# Altium PCB pcb.pcbdoc (part 6 of 6)
Units mm, origin at the board's own origin, x right, y up, seen from the top; angles counter-clockwise.
Board outline 95 x 60 mm, 4 copper layers (Top Layer, TopInt Layer, BotInt Layer, Bottom Layer), stack 1.459 mm thick; 162 components, 164 nets, 673 pads, 269 vias.
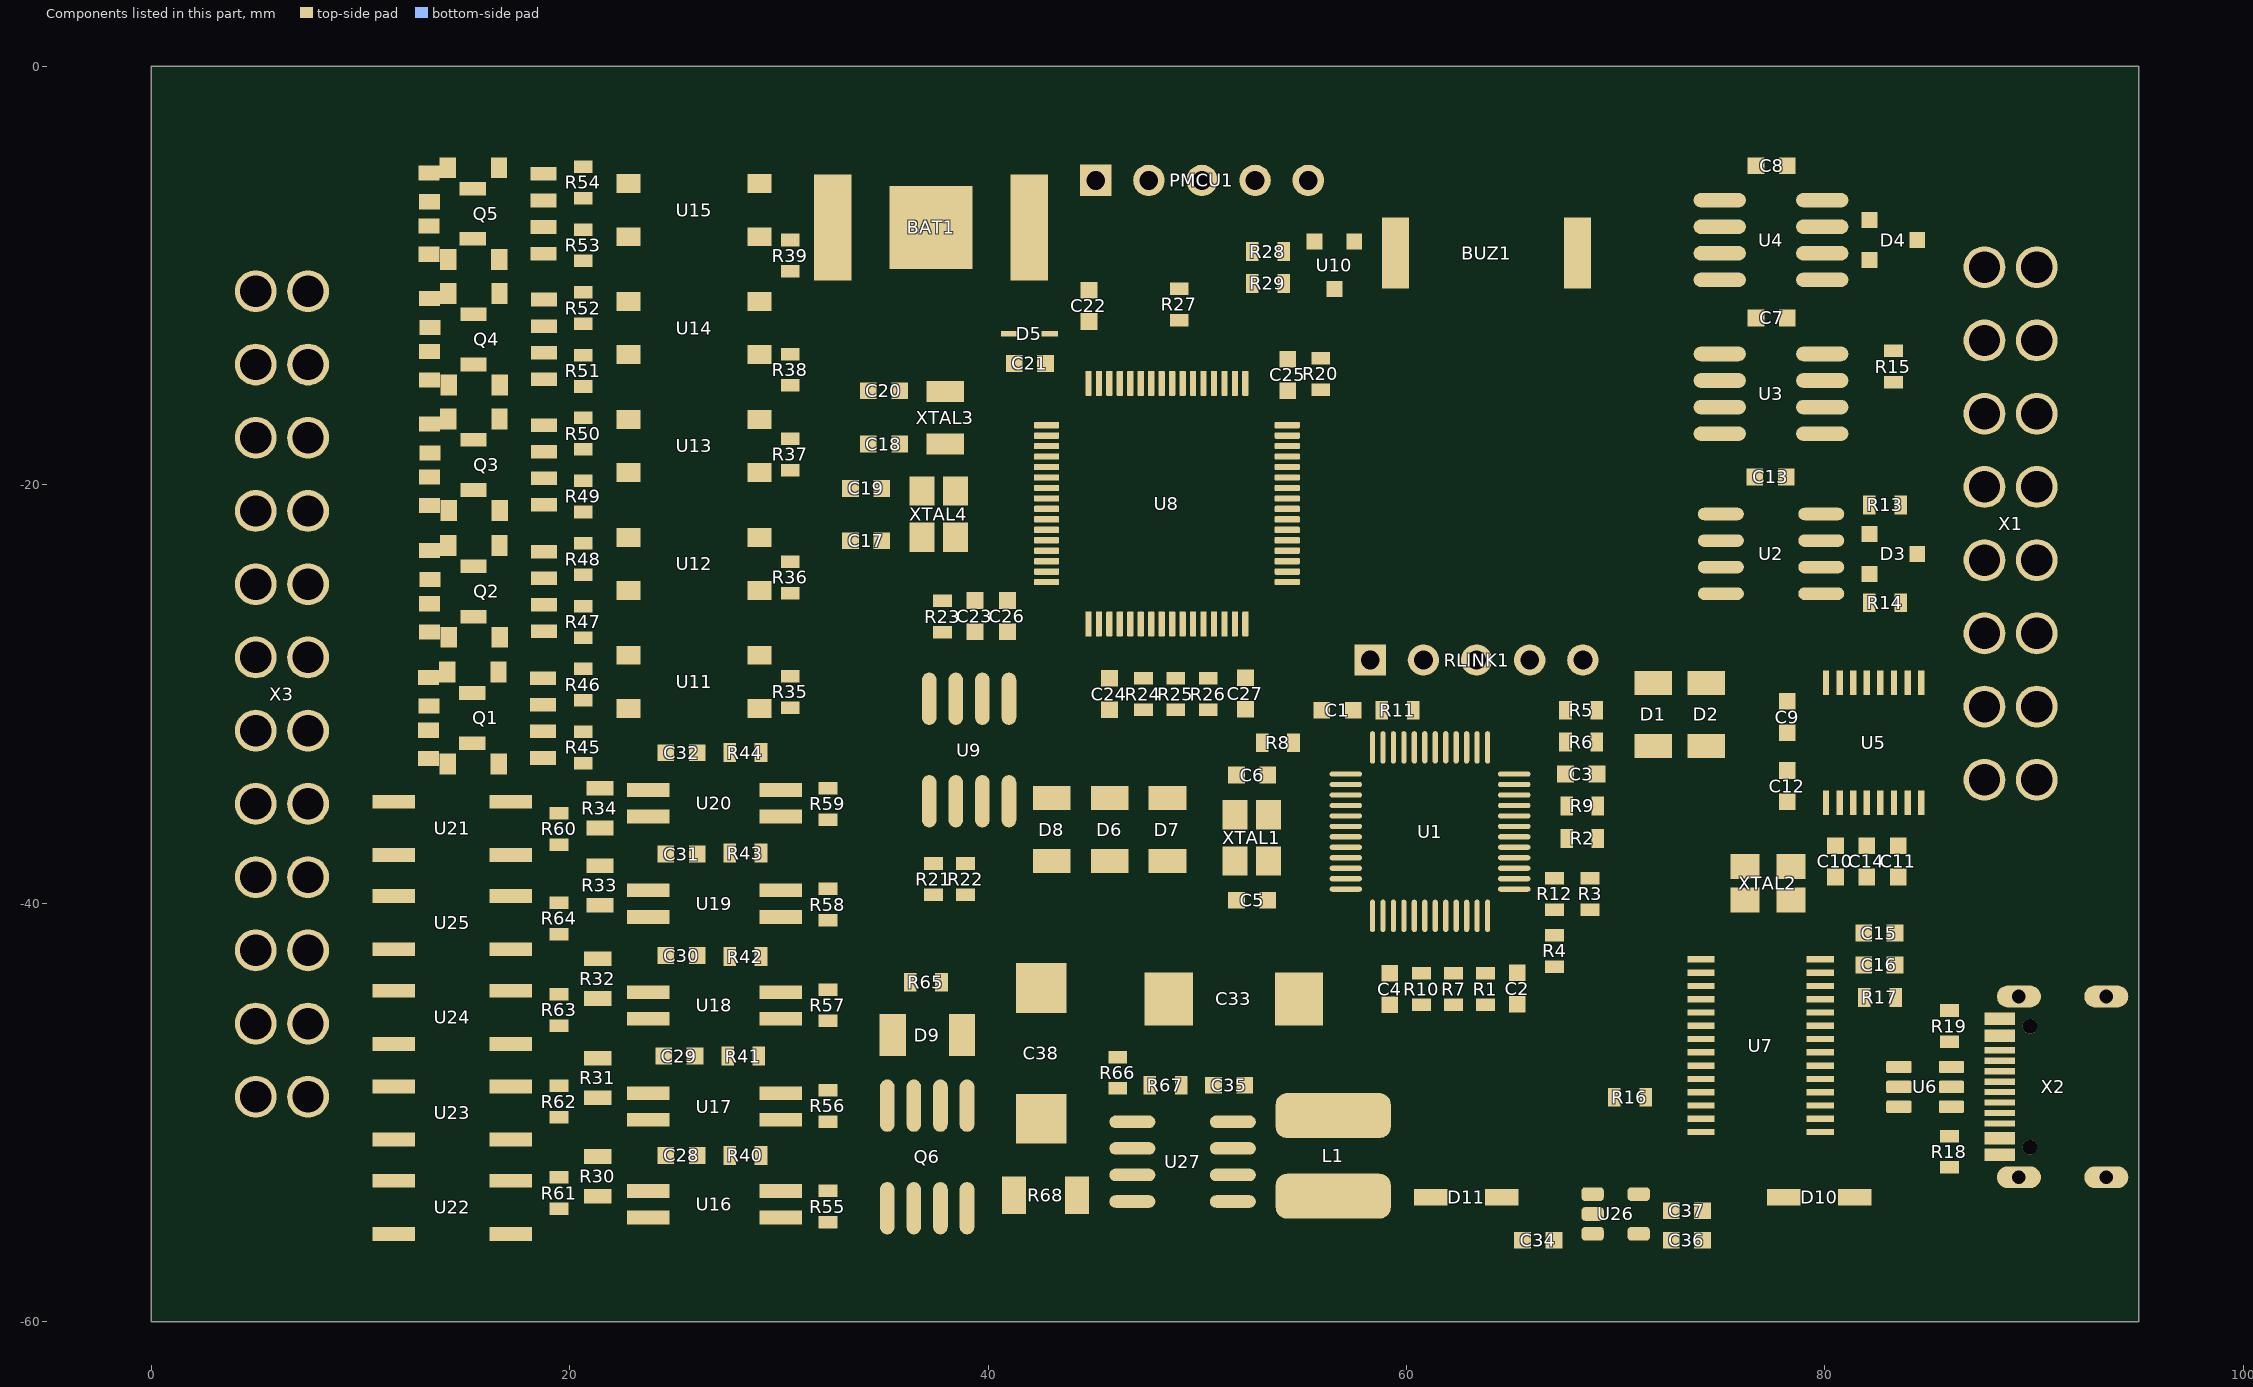
[diagram p8: the components of this part, seen from the top]

## Via types
v1: diameter 0.7, hole 0.3, Top Layer to Bottom Layer, tented both sides, 249 vias
v2: diameter 1, hole 0.5, Top Layer to Bottom Layer, tented both sides, 20 vias

## Nets (pads, with @x,y where several pads share a name; then routed paths per layer and width w, separated by ;. In a path a pad name is that pad's centre, name@x,y a point inside that pad or via, vN(x,y) a via of type N, cw(c..) or ccw(c..) an arc to the next point about the centre after c; other vN are vias at no path point) (continued)
copper on no net: (continued)
  Bottom Layer w0.025: 66.276,-8.705 66.453,-8.705 ; 66.276,-8.68 66.453,-8.68 ; 66.276,-7.486 66.453,-7.486 ; 66.276,-7.461 66.453,-7.461 ; 66.276,-7.435 66.453,-7.435 ; 66.276,-7.41 66.453,-7.41 ; 66.276,-5.251 66.428,-5.251 ; 66.276,-5.226 66.428,-5.226 ; 66.276,-5.2 66.428,-5.2 ; 66.276,-5.175 66.428,-5.175 ; 66.276,-5.149 66.428,-5.149 ; 66.276,-4.895 66.428,-4.895 ; 66.276,-4.87 66.428,-4.87 ; 66.276,-4.845 66.428,-4.845 ; 66.276,-4.819 66.428,-4.819 ; 66.276,-4.794 66.428,-4.794 ; 66.276,-4.768 66.428,-4.768 ; 66.276,-4.743 66.428,-4.743 ; 66.276,-4.718 66.428,-4.718 ; 66.276,-4.692 66.428,-4.692 ; 66.276,-4.667 66.428,-4.667 ; 66.276,-4.641 66.428,-4.641 ; 66.276,-4.616 66.428,-4.616 ; 66.276,-4.591 66.428,-4.591 ; 66.276,-4.565 66.428,-4.565 ; 66.276,-4.54 66.428,-4.54 ; 66.276,-4.514 66.428,-4.514 ; 66.276,-4.489 66.428,-4.489 ; 66.276,-4.464 66.428,-4.464 ; 66.276,-4.438 66.428,-4.438 ; 66.276,-4.413 66.428,-4.413 ; 66.276,-4.387 66.428,-4.387 ; 66.276,-4.362 66.428,-4.362 ; 66.276,-4.337 66.428,-4.337 ; 66.276,-4.083 66.428,-4.083 ; 66.276,-4.057 66.428,-4.057 ; 66.276,-4.032 66.428,-4.032 ; 66.276,-4.006 66.428,-4.006 ; 66.276,-3.981 66.428,-3.981 ; 66.276,-3.956 66.428,-3.956 ; 66.276,-3.93 66.428,-3.93 ; 66.276,-3.905 66.428,-3.905 ; 66.276,-3.879 66.428,-3.879 ; 66.276,-3.854 66.428,-3.854 ; 66.276,-3.829 66.428,-3.829 ; 66.276,-3.803 66.428,-3.803 ; 66.276,-3.778 66.428,-3.778 ; 66.276,-3.752 66.428,-3.752 ; 66.276,-3.727 66.428,-3.727 ; 66.276,-3.702 66.428,-3.702 ; 66.276,-3.676 66.428,-3.676 ; 66.276,-3.651 66.428,-3.651 ; 66.276,-3.625 66.428,-3.625 ; 66.276,-3.6 66.428,-3.6 ; 66.276,-3.575 66.428,-3.575 ; 66.276,-3.549 66.428,-3.549 ; 66.276,-3.524 66.428,-3.524 ; 66.276,-3.473 66.428,-3.473 ; 66.276,-3.448 66.428,-3.448 ; 66.301,-9.188 66.479,-9.188 ; 66.301,-9.163 66.479,-9.163 ; 66.301,-9.137 66.479,-9.137 ; 66.301,-8.655 66.479,-8.655 ; 66.301,-8.629 66.479,-8.629 ; 66.301,-8.604 66.504,-8.604 ; 66.301,-7.385 66.479,-7.385 ; 66.301,-7.359 66.733,-7.359 ; 66.301,-7.334 66.682,-7.334 ; 66.301,-7.308 66.631,-7.308 ; 66.301,-7.283 66.606,-7.283 ; 66.301,-7.258 66.555,-7.258 ; 66.301,-7.232 66.53,-7.232 ; 66.301,-7.207 66.53,-7.207 ; 66.301,-7.181 66.504,-7.181 ; 66.301,-7.156 66.479,-7.156 ; 66.301,-7.131 66.479,-7.131 ; 66.301,-7.105 66.479,-7.105 ; 66.301,-7.08 66.479,-7.08 ; 66.301,-7.054 66.479,-7.054 ; 66.301,-7.029 66.479,-7.029 ; 66.301,-7.004 66.479,-7.004 ; 66.301,-6.978 66.479,-6.978 ; 66.301,-6.953 66.479,-6.953 ; 66.301,-6.927 66.479,-6.927 ; 66.301,-6.902 66.479,-6.902 ; 66.301,-6.877 66.479,-6.877 ; 66.301,-6.851 67.165,-6.851 ; 66.301,-6.826 67.139,-6.826 ; 66.301,-6.8 67.088,-6.8 ; 66.301,-6.775 67.012,-6.775 ; 66.301,-6.75 66.885,-6.75 ; 66.301,-6.724 66.479,-6.724 ; 66.301,-6.699 66.479,-6.699 ; 66.301,-6.673 66.479,-6.673 ; 66.301,-6.648 66.479,-6.648 ; 66.301,-6.623 66.479,-6.623 ; 66.301,-6.597 66.479,-6.597 ; 66.301,-6.572 66.479,-6.572 ; 66.301,-6.546 66.479,-6.546 ; 66.301,-6.521 66.479,-6.521 ; 66.326,-9.264 66.53,-9.264 ; 66.326,-9.239 66.53,-9.239 ; 66.326,-9.213 66.504,-9.213 ; 66.326,-8.578 66.504,-8.578 ; 66.326,-8.553 66.53,-8.553 ; 66.326,-6.496 66.504,-6.496 ; 66.326,-6.47 66.504,-6.47 ; 66.326,-6.445 66.53,-6.445 ; 66.352,-9.315 66.58,-9.315 ; 66.352,-9.29 66.555,-9.29 ; 66.352,-8.528 66.555,-8.528 ; 66.352,-8.502 66.555,-8.502 ; 66.352,-6.419 66.53,-6.419 ; 66.352,-6.394 66.58,-6.394 ; 66.377,-9.34 66.606,-9.34 ; 66.377,-8.477 66.58,-8.477 ; 66.377,-8.451 66.606,-8.451 ; 66.377,-6.369 66.606,-6.369 ; 66.377,-6.343 66.657,-6.343 ; 66.403,-9.366 66.631,-9.366 ; 66.403,-8.426 66.657,-8.426 ; 66.403,-6.318 67.165,-6.318 ; 66.428,-9.391 66.682,-9.391 ; 66.428,-8.401 66.707,-8.401 ; 66.428,-6.292 67.139,-6.292 ; 66.453,-9.417 66.758,-9.417 ; 66.453,-8.375 66.784,-8.375 ; 66.453,-6.267 67.114,-6.267 ; 66.479,-9.442 67.241,-9.442 ; 66.479,-8.35 67.215,-8.35 ; 66.504,-9.467 67.19,-9.467 ; 66.504,-8.324 67.19,-8.324 ; 66.504,-7.385 67.241,-7.385 ; 66.504,-6.242 67.063,-6.242 ; 66.53,-9.493 67.165,-9.493 ; 66.53,-7.41 67.215,-7.41 ; 66.555,-8.299 67.139,-8.299 ; 66.555,-7.435 67.19,-7.435 ; 66.555,-6.216 67.012,-6.216 ; 66.58,-9.518 67.114,-9.518 ; 66.606,-8.274 67.088,-8.274 ; 66.606,-7.461 67.165,-7.461 ; 66.631,-9.544 67.063,-9.544 ; 66.657,-8.248 67.038,-8.248 ; 66.657,-7.486 67.114,-7.486 ; 66.657,-6.191 66.911,-6.191 ; 66.707,-4.794 66.885,-4.794 ; 66.707,-4.768 66.885,-4.768 ; 66.707,-4.743 66.885,-4.743 ; 66.707,-4.718 66.885,-4.718 ; 66.707,-4.692 66.86,-4.692 ; 66.707,-4.667 66.86,-4.667 ; 66.707,-4.641 66.86,-4.641 ; 66.707,-4.616 66.86,-4.616 ; 66.707,-4.591 66.86,-4.591 ; 66.707,-4.565 66.86,-4.565 ; 66.707,-4.54 66.86,-4.54 ; 66.707,-4.514 66.86,-4.514 ; 66.707,-4.489 66.885,-4.489 ; 66.707,-4.464 66.885,-4.464 ; 66.707,-4.438 66.885,-4.438 ; 66.707,-4.413 66.885,-4.413 ; 66.733,-7.512 67.063,-7.512 ; 66.733,-4.895 66.936,-4.895 ; 66.733,-4.87 66.911,-4.87 ; 66.733,-4.845 66.911,-4.845 ; 66.733,-4.819 66.885,-4.819 ; 66.733,-4.387 66.911,-4.387 ; 66.733,-4.362 66.911,-4.362 ; 66.733,-4.337 66.911,-4.337 ; 66.733,-4.311 66.936,-4.311 ; 66.758,-9.569 66.961,-9.569 ; 66.758,-4.946 66.961,-4.946 ; 66.758,-4.921 66.936,-4.921 ; 66.758,-4.286 66.936,-4.286 ; 66.758,-4.26 66.961,-4.26 ; 66.784,-6.877 67.19,-6.877 ; 66.784,-4.997 66.987,-4.997 ; 66.784,-4.972 66.961,-4.972 ; 66.784,-4.235 66.987,-4.235 ; 66.784,-4.21 66.987,-4.21 ; 66.809,-5.048 67.038,-5.048 ; 66.809,-5.022 67.012,-5.022 ; 66.809,-4.184 67.012,-4.184 ; 66.809,-4.159 67.038,-4.159 ; 66.834,-5.073 67.088,-5.073 ; 66.834,-4.133 67.088,-4.133 ; 66.86,-5.099 67.114,-5.099 ; 66.86,-4.108 67.139,-4.108 ; 66.885,-5.124 67.19,-5.124 ; 66.885,-4.083 67.215,-4.083 ; 66.911,-8.375 67.241,-8.375 ; 66.911,-6.902 67.215,-6.902 ; 66.911,-6.343 67.19,-6.343 ; 66.911,-5.149 67.673,-5.149 ; 66.911,-4.057 67.647,-4.057 ; 66.936,-9.417 67.266,-9.417 ; 66.936,-5.175 67.622,-5.175 ; 66.936,-4.032 67.622,-4.032 ; 66.987,-8.401 67.266,-8.401 ; 66.987,-7.359 67.266,-7.359 ; 66.987,-6.927 67.241,-6.927 ; 66.987,-6.369 67.215,-6.369 ; 66.987,-5.2 67.596,-5.2 ; 66.987,-4.006 67.596,-4.006 ; 67.012,-9.391 67.266,-9.391 ; 67.012,-6.394 67.241,-6.394 ; 67.012,-5.226 67.546,-5.226 ; 67.038,-8.426 67.292,-8.426 ; 67.038,-7.334 67.292,-7.334 ; 67.038,-6.953 67.266,-6.953 ; 67.038,-6.419 67.266,-6.419 ; 67.038,-3.981 67.546,-3.981 ; 67.063,-9.366 67.292,-9.366 ; 67.063,-7.308 67.292,-7.308 ; 67.063,-6.978 67.292,-6.978 ; 67.063,-6.445 67.266,-6.445 ; 67.088,-9.34 67.317,-9.34 ; 67.088,-8.451 67.317,-8.451 ; 67.088,-7.283 67.292,-7.283 ; 67.088,-7.004 67.292,-7.004 ; 67.088,-6.47 67.266,-6.47 ; 67.088,-5.251 67.495,-5.251 ; 67.088,-3.956 67.469,-3.956 ; 67.114,-9.315 67.342,-9.315 ; 67.114,-8.477 67.317,-8.477 ; 67.114,-7.258 67.317,-7.258 ; 67.114,-7.029 67.292,-7.029 ; 67.114,-6.572 67.292,-6.572 ; 67.114,-6.546 67.292,-6.546 ; 67.114,-6.521 67.292,-6.521 ; 67.114,-6.496 67.292,-6.496 ; 67.139,-9.29 67.342,-9.29 ; 67.139,-8.502 67.342,-8.502 ; 67.139,-7.232 67.317,-7.232 ; 67.139,-7.207 67.317,-7.207 ; 67.139,-7.181 67.317,-7.181 ; 67.139,-7.156 67.317,-7.156 ; 67.139,-7.131 67.317,-7.131 ; 67.139,-7.105 67.317,-7.105 ; 67.139,-7.08 67.317,-7.08 ; 67.139,-7.054 67.317,-7.054 ; 67.165,-9.264 67.368,-9.264 ; 67.165,-8.553 67.368,-8.553 ; 67.165,-8.528 67.368,-8.528 ; 67.19,-9.239 67.368,-9.239 ; 67.19,-9.213 67.393,-9.213 ; 67.19,-8.604 67.393,-8.604 ; 67.19,-8.578 67.368,-8.578 ; 67.19,-5.276 67.368,-5.276 ; 67.215,-9.188 67.393,-9.188 ; 67.215,-9.163 67.393,-9.163 ; 67.215,-8.655 67.419,-8.655 ; 67.215,-8.629 67.393,-8.629 ; 67.215,-3.93 67.342,-3.93 ; 67.241,-9.137 67.419,-9.137 ; 67.241,-9.112 67.419,-9.112 ; 67.241,-9.086 67.419,-9.086 ; 67.241,-9.061 67.419,-9.061 ; 67.241,-8.756 67.419,-8.756 ; 67.241,-8.731 67.419,-8.731 ; 67.241,-8.705 67.419,-8.705 ; 67.241,-8.68 67.419,-8.68 ; 67.266,-9.036 67.419,-9.036 ; 67.266,-9.01 67.419,-9.01 ; 67.266,-8.985 67.419,-8.985 ; 67.266,-8.959 67.444,-8.959 ; 67.266,-8.934 67.444,-8.934 ; 67.266,-8.909 67.444,-8.909 ; 67.266,-8.883 67.444,-8.883 ; 67.266,-8.858 67.444,-8.858 ; 67.266,-8.832 67.444,-8.832 ; 67.266,-8.807 67.419,-8.807 ; 67.266,-8.782 67.419,-8.782 ; 67.368,-5.124 67.698,-5.124 ; 67.368,-4.083 67.673,-4.083 ; 67.444,-5.099 67.723,-5.099 ; 67.444,-4.108 67.698,-4.108 ; 67.495,-5.073 67.723,-5.073 ; 67.495,-4.133 67.723,-4.133 ; 67.52,-5.048 67.749,-5.048 ; 67.52,-4.159 67.749,-4.159 ; 67.546,-5.022 67.774,-5.022 ; 67.546,-4.184 67.774,-4.184 ; 67.571,-4.997 67.774,-4.997 ; 67.571,-4.21 67.774,-4.21 ; 67.596,-7.486 67.749,-7.486 ; 67.596,-7.461 67.749,-7.461 ; 67.596,-7.435 67.749,-7.435 ; 67.596,-7.41 67.749,-7.41 ; 67.596,-7.385 67.749,-7.385 ; 67.596,-7.359 67.749,-7.359 ; 67.596,-7.334 67.749,-7.334 ; 67.596,-7.308 67.749,-7.308 ; 67.596,-7.283 67.749,-7.283 ; 67.596,-7.258 67.749,-7.258 ; 67.596,-7.232 67.749,-7.232 ; 67.596,-7.207 67.749,-7.207 ; 67.596,-7.181 67.749,-7.181 ; 67.596,-7.156 67.749,-7.156 ; 67.596,-7.131 67.749,-7.131 ; 67.596,-7.105 67.749,-7.105 ; 67.596,-7.08 67.749,-7.08 ; 67.596,-7.054 67.749,-7.054 ; 67.596,-7.029 67.749,-7.029 ; 67.596,-7.004 67.749,-7.004 ; 67.596,-6.978 67.749,-6.978 ; 67.596,-6.953 67.749,-6.953 ; 67.596,-6.927 67.749,-6.927 ; 67.596,-6.902 67.749,-6.902 ; 67.596,-6.877 67.749,-6.877 ; 67.596,-6.851 67.749,-6.851 ; 67.596,-6.826 67.749,-6.826 ; 67.596,-6.8 67.749,-6.8 ; 67.596,-6.775 67.749,-6.775 ; 67.596,-6.75 67.749,-6.75 ; 67.596,-6.724 67.749,-6.724 ; 67.596,-6.699 67.749,-6.699 ; 67.596,-6.673 67.749,-6.673 ; 67.596,-6.648 67.749,-6.648 ; 67.596,-6.623 67.749,-6.623 ; 67.596,-6.597 67.749,-6.597 ; 67.596,-6.572 67.774,-6.572 ; 67.596,-6.546 67.774,-6.546 ; 67.596,-6.521 67.774,-6.521 ; 67.596,-6.496 67.774,-6.496 ; 67.596,-4.972 67.8,-4.972 ; 67.596,-4.26 67.8,-4.26 ; 67.596,-4.235 67.8,-4.235 ; 67.622,-6.47 67.8,-6.47 ; 67.622,-6.445 67.8,-6.445 ; 67.622,-6.419 67.825,-6.419 ; 67.622,-6.394 67.85,-6.394 ; 67.622,-4.946 67.8,-4.946 ; 67.622,-4.921 67.825,-4.921 ; 67.622,-4.286 67.825,-4.286 ; 67.647,-9.29 67.825,-9.29 ; 67.647,-9.264 67.825,-9.264 ; 67.647,-9.239 67.825,-9.239 ; 67.647,-9.213 67.825,-9.213 ; 67.647,-9.188 67.825,-9.188 ; 67.647,-9.163 67.825,-9.163 ; 67.647,-9.137 67.825,-9.137 ; 67.647,-9.112 67.85,-9.112 ; 67.647,-8.629 67.825,-8.629 ; 67.647,-8.604 67.825,-8.604 ; 67.647,-8.578 67.825,-8.578 ; 67.647,-8.553 67.825,-8.553 ; 67.647,-6.369 67.876,-6.369 ; 67.647,-6.343 67.952,-6.343 ; 67.647,-4.895 67.825,-4.895 ; 67.647,-4.87 67.825,-4.87 ; 67.647,-4.337 67.825,-4.337 ; 67.647,-4.311 67.825,-4.311 ; 67.673,-9.366 67.901,-9.366 ; 67.673,-9.34 67.876,-9.34 ; 67.673,-9.315 67.85,-9.315 ; 67.673,-9.086 67.876,-9.086 ; 67.673,-9.061 67.901,-9.061 ; 67.673,-8.528 67.85,-8.528 ; 67.673,-8.502 67.85,-8.502 ; 67.673,-8.477 67.876,-8.477 ; 67.673,-6.318 68.358,-6.318 ; 67.673,-4.845 67.85,-4.845 ; 67.673,-4.819 67.85,-4.819 ; 67.673,-4.794 67.85,-4.794 ; 67.673,-4.768 67.85,-4.768 ; 67.673,-4.438 67.85,-4.438 ; 67.673,-4.413 67.85,-4.413 ; 67.673,-4.387 67.85,-4.387 ; 67.673,-4.362 67.85,-4.362 ; 67.698,-9.391 67.952,-9.391 ; 67.698,-9.036 67.927,-9.036 ; 67.698,-9.01 67.977,-9.01 ; 67.698,-8.451 67.901,-8.451 ; 67.698,-8.426 67.952,-8.426 ; 67.698,-6.292 68.333,-6.292 ; 67.698,-4.743 67.85,-4.743 ; 67.698,-4.718 67.876,-4.718 ; 67.698,-4.692 67.876,-4.692 ; 67.698,-4.667 67.876,-4.667 ; 67.698,-4.641 67.876,-4.641 ; 67.698,-4.616 67.876,-4.616 ; 67.698,-4.591 67.876,-4.591 ; 67.698,-4.565 67.876,-4.565 ; 67.698,-4.54 67.876,-4.54 ; 67.698,-4.514 67.876,-4.514 ; 67.698,-4.489 67.876,-4.489 ; 67.698,-4.464 67.85,-4.464 ; 67.723,-9.417 68.028,-9.417 ; 67.723,-8.985 68.054,-8.985 ; 67.723,-8.401 67.977,-8.401 ; 67.723,-6.267 68.308,-6.267 ; 67.749,-9.442 68.536,-9.442 ; 67.749,-8.959 68.155,-8.959 ; 67.749,-8.375 68.079,-8.375 ; 67.749,-8.35 68.511,-8.35 ; 67.749,-6.242 68.257,-6.242 ; 67.774,-9.467 68.511,-9.467 ; 67.774,-8.934 68.257,-8.934 ; 67.8,-9.493 68.46,-9.493 ; 67.8,-8.324 68.485,-8.324 ; 67.8,-6.216 68.206,-6.216 ; 67.825,-8.909 68.333,-8.909 ; 67.825,-8.299 68.435,-8.299 ; 67.85,-9.518 68.435,-9.518 ; 67.876,-8.883 68.409,-8.883 ; 67.876,-8.274 68.409,-8.274 ; 67.876,-6.191 68.13,-6.191 ; 67.901,-9.544 68.358,-9.544 ; 67.952,-8.858 68.46,-8.858 ; 67.952,-8.248 68.333,-8.248 ; 67.952,-4.083 68.384,-4.083 ; 67.952,-4.057 68.384,-4.057 ; 67.952,-4.032 68.358,-4.032 ; 67.952,-4.006 68.333,-4.006 ; 67.952,-3.981 68.282,-3.981 ; 67.952,-3.956 68.231,-3.956 ; 68.028,-9.569 68.257,-9.569 ; 68.028,-8.832 68.485,-8.832 ; 68.028,-3.93 68.13,-3.93 ; 68.13,-8.807 68.511,-8.807 ; 68.13,-6.343 68.384,-6.343 ; 68.181,-4.108 68.587,-4.108 ; 68.206,-8.375 68.536,-8.375 ; 68.206,-6.369 68.587,-6.369 ; 68.231,-8.782 68.536,-8.782 ; 68.231,-6.394 68.587,-6.394 ; 68.231,-4.133 68.587,-4.133 ; 68.257,-9.417 68.562,-9.417 ; 68.282,-8.756 68.562,-8.756 ; 68.282,-6.419 68.587,-6.419 ; 68.282,-4.159 68.587,-4.159 ; 68.308,-8.401 68.562,-8.401 ; 68.308,-6.445 68.587,-6.445 ; 68.308,-4.184 68.587,-4.184 ; 68.333,-9.391 68.587,-9.391 ; 68.333,-8.731 68.587,-8.731 ; 68.333,-8.426 68.562,-8.426 ; 68.333,-6.496 68.587,-6.496 ; 68.333,-6.47 68.587,-6.47 ; 68.333,-4.21 68.587,-4.21 ; 68.358,-9.366 68.587,-9.366 ; 68.358,-6.521 68.587,-6.521 ; 68.358,-4.26 68.587,-4.26 ; 68.358,-4.235 68.587,-4.235 ; 68.384,-8.705 68.587,-8.705 ; 68.384,-8.451 68.587,-8.451 ; 68.384,-6.572 68.587,-6.572 ; 68.384,-6.546 68.587,-6.546 ; 68.384,-4.311 68.587,-4.311 ; 68.384,-4.286 68.587,-4.286 ; 68.409,-9.34 68.612,-9.34 ; 68.409,-8.68 68.587,-8.68 ; 68.409,-8.655 68.587,-8.655 ; 68.409,-8.502 68.587,-8.502 ; 68.409,-8.477 68.587,-8.477 ; 68.409,-7.486 68.587,-7.486 ; 68.409,-7.461 68.587,-7.461 ; 68.409,-7.435 68.587,-7.435 ; 68.409,-7.41 68.587,-7.41 ; 68.409,-7.385 68.587,-7.385 ; 68.409,-7.359 68.587,-7.359 ; 68.409,-7.334 68.587,-7.334 ; 68.409,-7.308 68.587,-7.308 ; 68.409,-7.283 68.587,-7.283 ; 68.409,-7.258 68.587,-7.258 ; 68.409,-7.232 68.587,-7.232 ; 68.409,-7.207 68.587,-7.207 ; 68.409,-7.181 68.587,-7.181 ; 68.409,-7.156 68.587,-7.156 ; 68.409,-7.131 68.587,-7.131 ; 68.409,-7.105 68.587,-7.105 ; 68.409,-7.08 68.587,-7.08 ; 68.409,-7.054 68.587,-7.054 ; 68.409,-7.029 68.587,-7.029 ; 68.409,-7.004 68.587,-7.004 ; 68.409,-6.978 68.587,-6.978 ; 68.409,-6.953 68.587,-6.953 ; 68.409,-6.927 68.587,-6.927 ; 68.409,-6.902 68.587,-6.902 ; 68.409,-6.877 68.587,-6.877 ; 68.409,-6.851 68.587,-6.851 ; 68.409,-6.826 68.587,-6.826 ; 68.409,-6.8 68.587,-6.8 ; 68.409,-6.775 68.587,-6.775 ; 68.409,-6.75 68.587,-6.75 ; 68.409,-6.724 68.587,-6.724 ; 68.409,-6.699 68.587,-6.699 ; 68.409,-6.673 68.587,-6.673 ; 68.409,-6.648 68.587,-6.648 ; 68.409,-6.623 68.587,-6.623 ; 68.409,-6.597 68.587,-6.597 ; 68.409,-6.343 68.587,-6.343 ; 68.409,-6.318 68.587,-6.318 ; 68.409,-6.292 68.587,-6.292 ; 68.409,-6.267 68.587,-6.267 ; 68.409,-6.242 68.587,-6.242 ; 68.409,-6.216 68.587,-6.216 ; 68.409,-6.191 68.587,-6.191 ; 68.409,-6.165 68.587,-6.165 ; 68.409,-6.14 68.587,-6.14 ; 68.409,-6.115 68.587,-6.115 ; 68.409,-6.089 68.587,-6.089 ; 68.409,-6.064 68.587,-6.064 ; 68.409,-6.038 68.587,-6.038 ; 68.409,-6.013 68.587,-6.013 ; 68.409,-5.988 68.587,-5.988 ; 68.409,-5.962 68.587,-5.962 ; 68.409,-5.937 68.587,-5.937 ; 68.409,-5.911 68.587,-5.911 ; 68.409,-5.886 68.587,-5.886 ; 68.409,-5.861 68.587,-5.861 ; 68.409,-5.835 68.587,-5.835 ; 68.409,-5.81 68.587,-5.81 ; 68.409,-5.784 68.587,-5.784 ; 68.409,-5.759 68.587,-5.759 ; 68.409,-5.734 68.587,-5.734 ; 68.409,-5.708 68.587,-5.708 ; 68.409,-5.683 68.587,-5.683 ; 68.409,-5.251 68.587,-5.251 ; 68.409,-5.226 68.587,-5.226 ; 68.409,-5.2 68.587,-5.2 ; 68.409,-5.175 68.587,-5.175 ; 68.409,-5.149 68.587,-5.149 ; 68.409,-5.124 68.587,-5.124 ; 68.409,-5.099 68.587,-5.099 ; 68.409,-5.073 68.587,-5.073 ; 68.409,-5.048 68.587,-5.048 ; 68.409,-5.022 68.587,-5.022 ; 68.409,-4.997 68.587,-4.997 ; 68.409,-4.972 68.587,-4.972 ; 68.409,-4.946 68.587,-4.946 ; 68.409,-4.921 68.587,-4.921 ; 68.409,-4.895 68.587,-4.895 ; 68.409,-4.87 68.587,-4.87 ; 68.409,-4.845 68.587,-4.845 ; 68.409,-4.819 68.587,-4.819 ; 68.409,-4.794 68.587,-4.794 ; 68.409,-4.768 68.587,-4.768 ; 68.409,-4.743 68.587,-4.743 ; 68.409,-4.718 68.587,-4.718 ; 68.409,-4.692 68.587,-4.692 ; 68.409,-4.667 68.587,-4.667 ; 68.409,-4.641 68.587,-4.641 ; 68.409,-4.616 68.587,-4.616 ; 68.409,-4.591 68.587,-4.591 ; 68.409,-4.565 68.587,-4.565 ; 68.409,-4.54 68.587,-4.54 ; 68.409,-4.514 68.587,-4.514 ; 68.409,-4.489 68.587,-4.489 ; 68.409,-4.464 68.587,-4.464 ; 68.409,-4.438 68.587,-4.438 ; 68.409,-4.413 68.587,-4.413 ; 68.409,-4.387 68.587,-4.387 ; 68.409,-4.362 68.587,-4.362 ; 68.409,-4.337 68.587,-4.337 ; 68.409,-4.083 68.587,-4.083 ; 68.409,-4.057 68.587,-4.057 ; 68.409,-4.032 68.587,-4.032 ; 68.409,-4.006 68.587,-4.006 ; 68.409,-3.981 68.587,-3.981 ; 68.409,-3.956 68.587,-3.956 ; 68.435,-9.315 68.612,-9.315 ; 68.435,-9.29 68.638,-9.29 ; 68.435,-8.629 68.612,-8.629 ; 68.435,-8.604 68.612,-8.604 ; 68.435,-8.578 68.612,-8.578 ; 68.435,-8.553 68.612,-8.553 ; 68.435,-8.528 68.612,-8.528 ; 68.46,-9.264 68.638,-9.264 ; 68.46,-9.239 68.638,-9.239 ; 68.46,-9.213 68.638,-9.213 ; 68.485,-9.188 68.638,-9.188 ; 66.276,-3.498 66.428,-3.498 66.276,-3.498

## Polygon pours and split planes (outlines as drawn)
VCC3.3V on BotInt Layer "g" (solid, remove dead copper, pour order 12): 1,-59 94,-59 94,-1 1,-1
IN_COM on BotInt Layer "g" (solid, remove dead copper, pour order 10): 27,-31.25 27,-59 1,-59 1,-27.25 7,-27.25 8.25,-28.5 8.25,-32.75 18,-32.75 20.25,-30.5 26.25,-30.5
NetQ6_5 on Bottom Layer "g" (solid, remove dead copper, pour order 0): 40,-52.1 40,-55.35 38.75,-56.6 2.75,-56.6 1.15,-55 1.15,-49.85 3.1,-47.9 10.55,-47.9 15.95,-53.3 32.85,-53.3 34.7,-51.45 39.35,-51.45
GND on TopInt Layer "g" (solid, remove dead copper, pour order 2): 1,-59 94,-59 94,-1 1,-1

## Other copper
Top Layer:
  region net NetQ4_2: 19.4,-15.425 17.525,-15.425 17.35,-15.25 17.35,-12.25 17.65,-11.95 19.45,-11.95 19.45,-13.05 18.15,-13.05 17.95,-13.25 17.95,-14.2 18.15,-14.4 19.4,-14.4
  region net NetQ1_2: 19.35,-33.525 17.475,-33.525 17.3,-33.35 17.3,-30.35 17.6,-30.05 19.4,-30.05 19.4,-31.15 18.1,-31.15 17.9,-31.35 17.9,-32.3 18.1,-32.5 19.35,-32.5
  region net NetQ2_2: 19.4,-27.475 17.525,-27.475 17.35,-27.3 17.35,-24.3 17.65,-24 19.45,-24 19.45,-25.1 18.15,-25.1 17.95,-25.3 17.95,-26.25 18.15,-26.45 19.4,-26.45
  region net NetQ3_2: 19.4,-21.425 17.525,-21.425 17.35,-21.25 17.35,-18.25 17.65,-17.95 19.45,-17.95 19.45,-19.05 18.15,-19.05 17.95,-19.25 17.95,-20.2 18.15,-20.4 19.4,-20.4
  region net NetQ5_2: 19.375,-9.42 17.5,-9.42 17.325,-9.245 17.325,-6.245 17.625,-5.945 19.425,-5.945 19.425,-7.045 18.125,-7.045 17.925,-7.245 17.925,-8.195 18.125,-8.395 19.375,-8.395
Multi-Layer:
  pour cut-out: 0,-3.25 13.75,-3.25 15.25,-4.75 15.25,-32.75 8.332,-32.75 8.332,-28.582 7,-27.25 0,-27.25

## Silkscreen, mask and mechanical layers (free items; w line width, h text height)
Top Overlay:
  drawing of 385 lines, arcs and shapes, not listed
Bottom Overlay:
  drawing of 443 lines, arcs and shapes, not listed
  text "GND" at 44.75,-9.2 h0.7 r270
  text "SWO" at 47.3,-9.25 h0.7 r270
  text "SDIO" at 52.3,-9.65 h0.7 r270
  text "3.3V" at 55.05,-9.65 h0.7 r270
  text "CH" at 85.651,-9.955 h0.7
  text "CH" at 83.137,-9.98 h0.7
  text "SWCLK" at 49.8,-10.475 h0.7 r270
  text "41" at 14.6,-11 h0.7
  text "40" at 17.2,-11 h0.7
  text "BareMetal PLC - M" at 74.75,-11.25 h1
  text "RHB.PL.00001" at 74.775,-13.075 h1
  text "CL" at 85.651,-13.445 h0.7
  text "CL" at 83.137,-13.47 h0.7
  text "31" at 14.6,-14.5 h0.7
  text "30" at 17.2,-14.5 h0.7
  text "HW 0.1.2" at 74.8,-14.9 h1
  text "RB" at 85.651,-16.935 h0.7
  text "RA" at 83.137,-16.96 h0.7
  text "21" at 14.6,-18 h0.7
  text "20" at 17.1,-18 h0.7
  text "t" at 68.525,-19.85 h6
  text "TA" at 85.651,-20.425 h0.7
  text "TB" at 83.137,-20.45 h0.7
  text "p" at 75.025,-21.1 h7
  text "11" at 14.5,-21.5 h0.7
  text "10" at 17.1,-21.5 h0.7
  text "RB" at 85.651,-23.915 h0.7
  text "RB" at 83.137,-23.941 h0.7
  text "01" at 14.6,-25 h0.7
  text "00" at 17.1,-25 h0.7
  text "RA" at 85.651,-27.405 h0.7
  text "RA" at 83.137,-27.431 h0.7
  text "OC" at 17.176,-28.48 h0.7
  text "IC" at 14.636,-28.505 h0.7
  text "TX" at 85.651,-30.895 h0.7
  text "RX" at 83.137,-30.921 h0.7
  text "GND" at 57.95,-31.6 h0.7 r270
  text "O4" at 17.176,-31.883 h0.7
  text "I4" at 14.662,-31.909 h0.7
  text "SDIO" at 65.675,-32.025 h0.7 r270
  text "3.3V" at 68.1,-32.125 h0.7 r270
  text "SWCLK" at 63.05,-33 h0.7 r270
  text "GND" at 83.175,-34.3 h0.5
  text "GND" at 85.725,-34.325 h0.5
  text "I3" at 14.636,-35.49 h0.7
  text "O3" at 17.151,-35.49 h0.7
  text "O2" at 17.151,-38.868 h0.7
  text "I2" at 14.611,-38.894 h0.7
  text "O1" at 17.018,-42.418 h0.7
  text "I1" at 14.503,-42.469 h0.7
  text "O0" at 17.176,-45.879 h0.7
  text "I0" at 14.636,-45.904 h0.7
  text "GND" at 17.221,-49.378 h0.5
  text "VCC" at 14.681,-49.403 h0.5
  text "12-24V" at 17.3,-51.9 h0.7
Top Solder:
  drawing of 2200 lines, arcs and shapes, not listed
Bottom Solder:
  drawing of 2200 lines, arcs and shapes, not listed
Board:
  the board outline again, w0.15
TopAssy:
  lines w0.15: 0,-56 95,-56 ; 0,-4 95,-4